# Altium PCB Pre-Proj-Pch.PcbDoc
Units mil, origin at the board's own origin, x right, y up, seen from the top; angles counter-clockwise.
Board outline 6000 x 4000 mil, 2 copper layers (Top Layer, Bottom Layer); 15 components, 29 nets, 105 pads, 0 vias.
Unrouted connection lines stored in the file: 2.
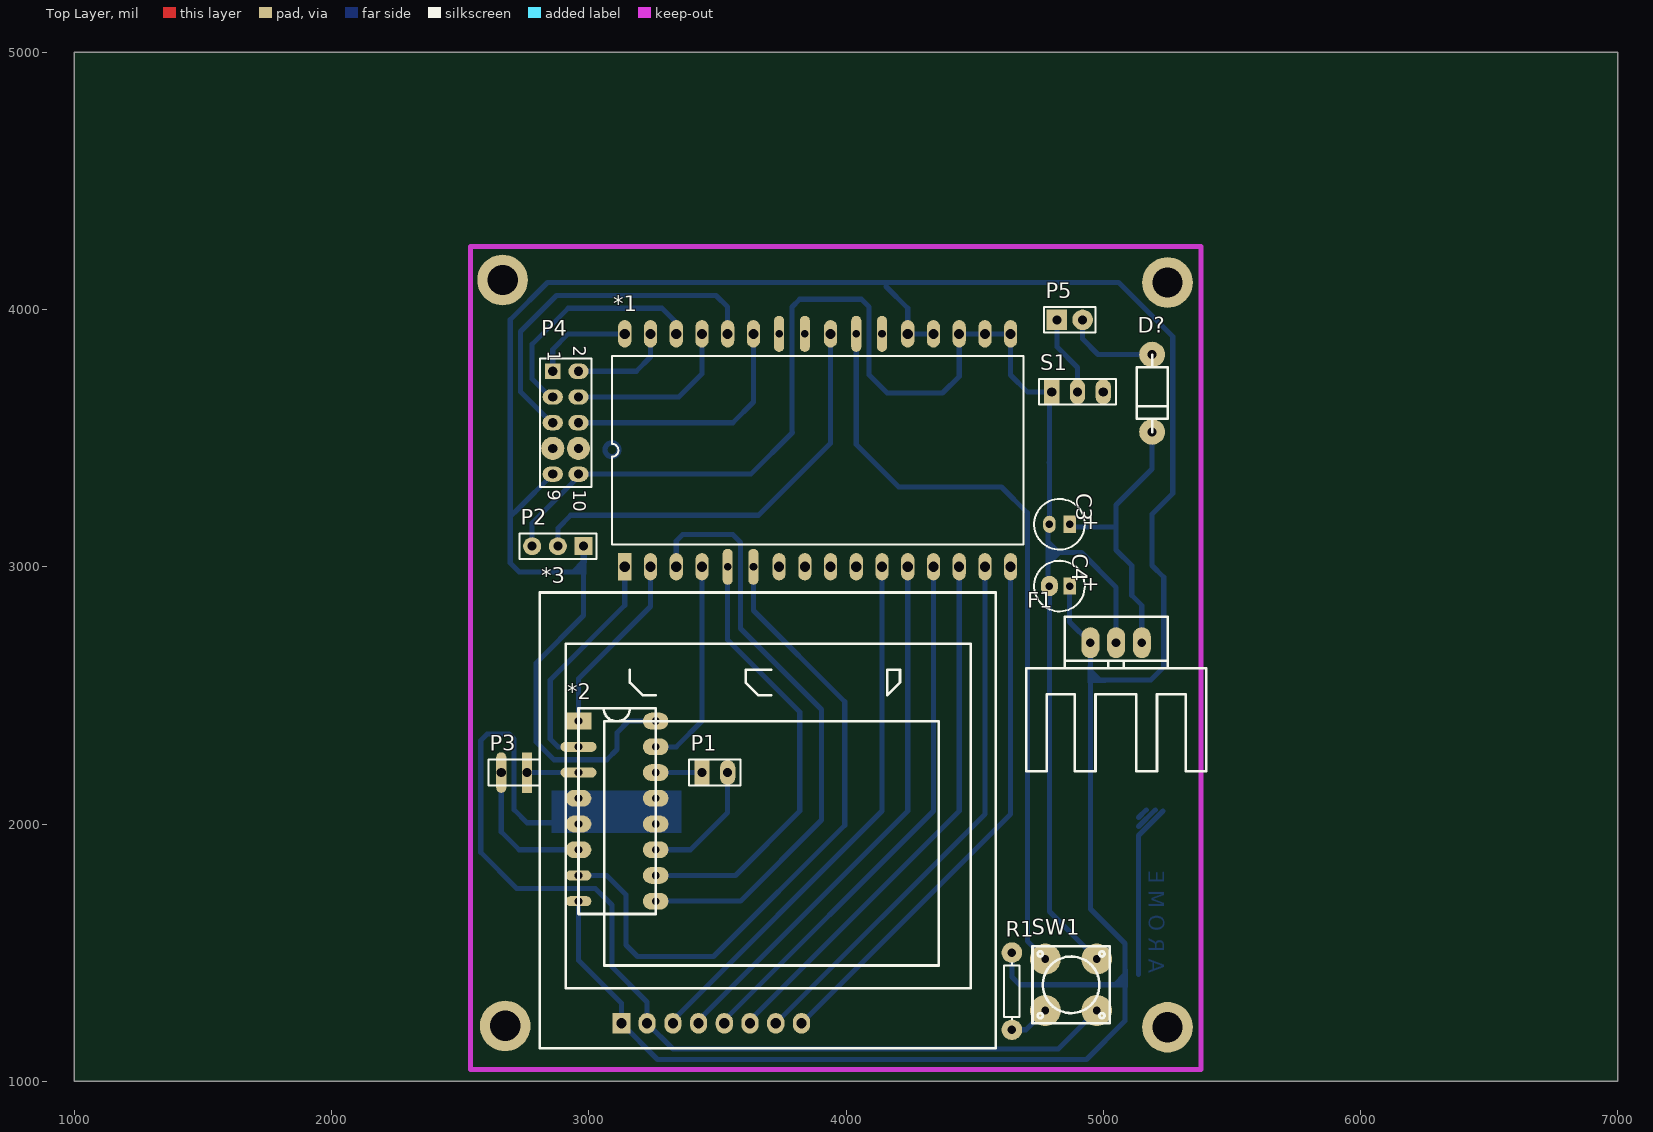
[diagram p0: Top Layer view]
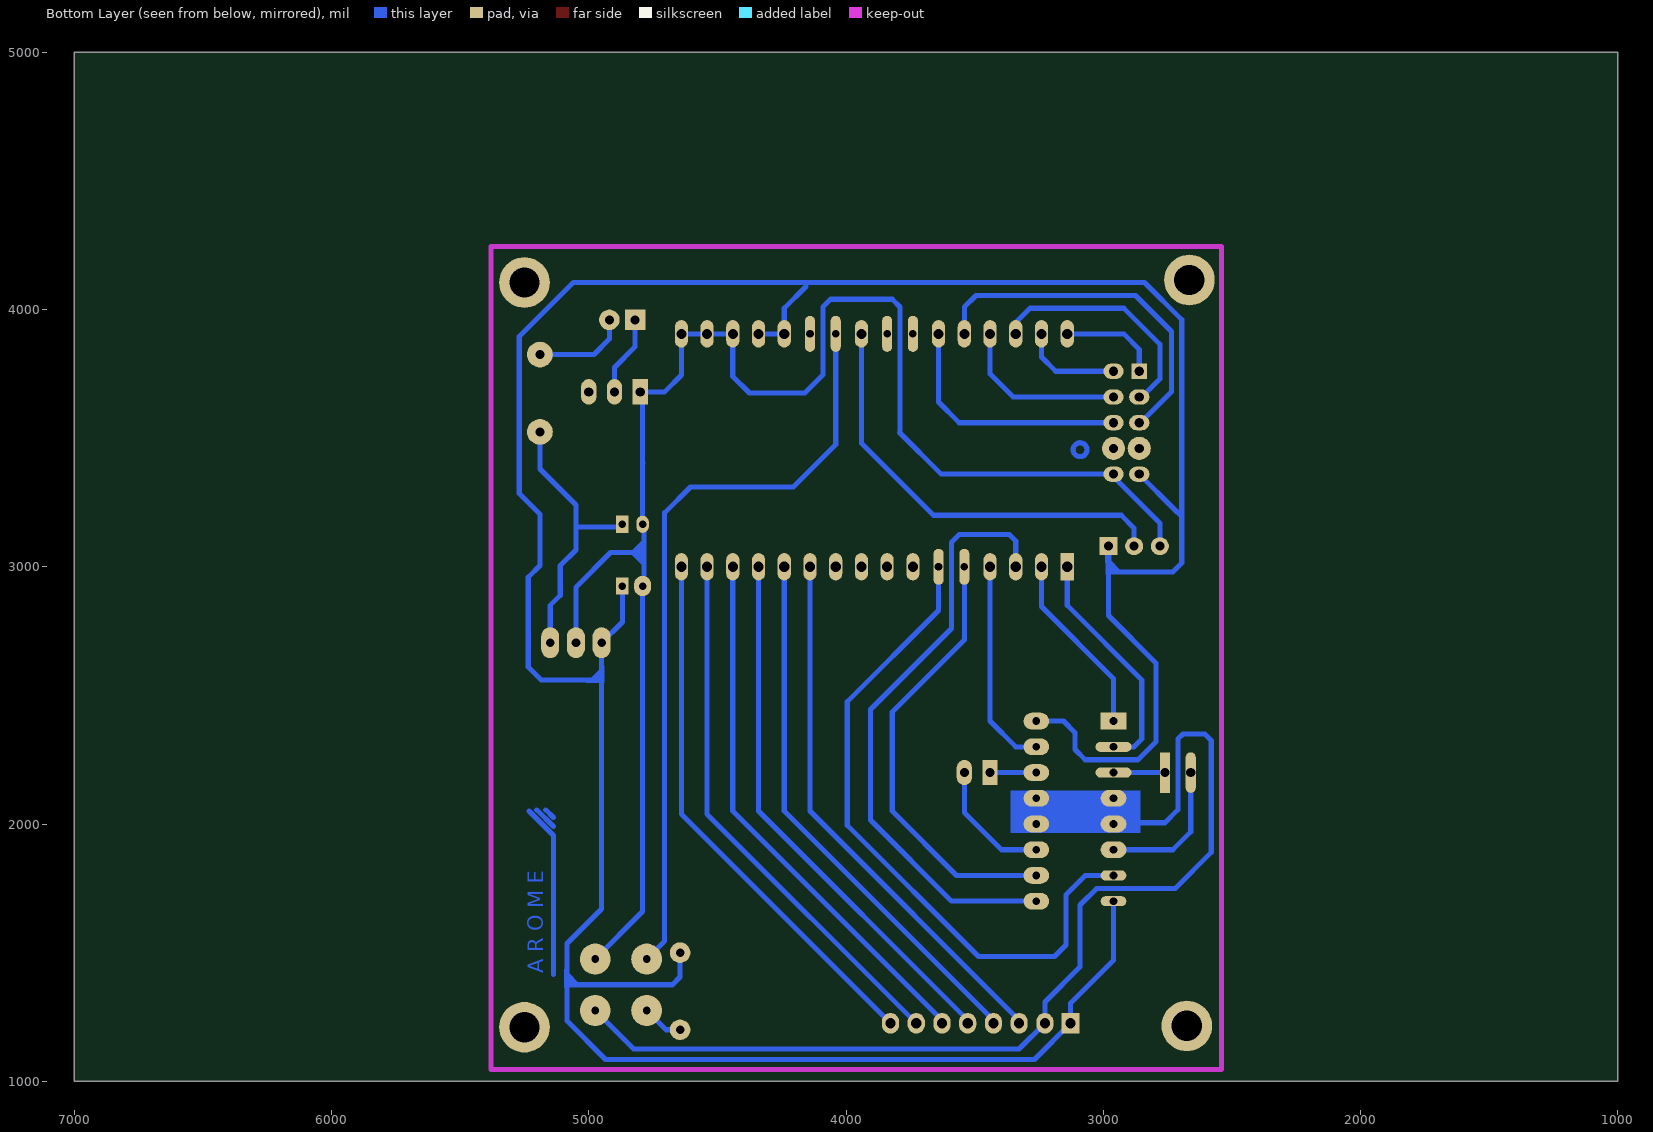
[diagram p1: Bottom Layer view, seen from below]

## Layer stack, top to bottom
Top Layer: signal copper 1.4
Dielectric: dielectric 12.6, FR-4, Dk 4.8
Bottom Layer: signal copper 1.4

## Board outline
1000,1000 7000,1000 7000,5000 1000,5000

## Design rules (kind name [scope] priority, off if disabled: settings)
Clearance [All] p1: gap=20
PolygonConnect [All] p1: connectstyle=Relief reliefconductorwidth=10 reliefentries=4 polygonreliefangle="90 Angle"
RoutingVias [All] p1: holewidth=28 width=50 viastyle="Through Hole" minholewidth=28 minwidth=50 maxholewidth=28 maxwidth=50
SilkscreenOverComponentPads [All] p1: minsilkscreentomaskgap=10
SolderMaskExpansion [All] p1: expansion=4
Width [All] p1: maxlimit=25 minlimit=20 preferedwidth=20
27 further rules are at their usual default settings.

## Components (designator, comment, footprint, x,y, rotation, side; value= is the part's Value field where it differs from the comment)
*1 "Atmega8_Stamp" Atmega8_Stamp 3140,3000 r90 top
*2 "L293D" dip-16 3060,2300 r0 top
*3 "GLCDBoxHeader10Pin" GLCDBoxHeader10Pin 3560,2800 r0 top
C3 "Cap Pol1" CAPPR2-5x6.8#1 4830,3165 r180 top
C4 "Cap Pol1" CAPPR2-5x6.8#2 4830,2925 r180 top
D? "DIODE" diode 5290,3625 r270 top
F1 "L7805CV" 78xx 4950,2905 r180 top
P1 "Header 2" HDR1X2#1 3440,2200 r0 top
P2 "Header 3" HDR1X3#1 2980,3080 r180 top
P3 "Header 2" HDR1X2#2 2760,2200 r180 top
P4 "Header 5X2" HDR2X5 2860,3760 r270 top
P5 "Header 2" HDR1X2#3 4820,3960 r0 top
R1 "Res1" AXIAL-0.3 4645,1350 r90 top
S1 "SW-SPDT" HDR1X3#2 4800,3680 r0 top
SW1 "U-SW4" u-sw4 4875,1375 r0 top

## Footprints (in the part's own frame and the unit in brackets; to place one, negate y for a bottom-side part, rotate by r counter-clockwise, add the part's x,y. Pads: shape width x height; smd on the part's side, far side on the other; paste and mask are expansions set on the pad)
78xx [mil]
  oval 70x120 hole 34: 1(-200,200) 2(-100,200) 3(0,200)
  silkscreen extent -450,100 250,700
Atmega8_Stamp [mm]
  rect 2.7x1.3 hole 1: 1(0,0)
  oval 2.7x1.3 hole 1: 2(0,-2.54) 3(0,-5.08) 4(0,-7.62) 7(0,-15.24) 8(0,-17.78) 9(0,-20.32) 10(0,-22.86) 11(0,-25.4) 12(0,-27.94) 13(0,-30.48) 14(0,-33.02) 15(0,-35.56) 16(0,-38.1) 17(23,-38.1) 18(23,-35.56) 19(23,-33.02) 20(23,-30.48) 21(23,-27.94) 24(23,-20.32) 27(23,-12.7) 28(23,-10.16) 29(23,-7.62) 30(23,-5.08) 31(23,-2.54) 32(23,0)
  oval 3.556x1 hole 0.762: 5(0,-10.16) 6(0,-12.7) 22(23,-25.4) 23(23,-22.86) 25(23,-17.78) 26(23,-15.24)
  silkscreen extent 2.18,-39.37 20.82,1.27
AXIAL-0.3 [mil] "Axial Device, Thru-Hole; 2 Leads; 0.3 in Pin Spacing"
  round 80 hole 33.46: 1(-150,0) 2(150,0)
  silkscreen extent -109,-30 109,30
CAPPR2-5x6.8#1 [mm] "Capacitor, Electrolytic, Radial; Body 5 x 6.8 mm (Dia.xH typ); Pin Spacing 2 mm (typ)"
  rect 1.25x1.7 hole 0.75: 1(-1,0)
  oval 1.25x1.7 hole 0.75: 2(1,0)
  silkscreen extent -2.5,-2.5 2.5,2.5
CAPPR2-5x6.8#2 [mm] "Capacitor, Electrolytic, Radial; Body 5 x 6.8 mm (Dia.xH typ); Pin Spacing 2 mm (typ)"
  rect 1.25x1.7 hole 0.75: 1(-1,0)
  oval 1.7x2 hole 0.75: 2(1,0)
  silkscreen extent -2.5,-2.5 2.5,2.5
diode [mil]
  round 100 hole 35: 1(-200,-100) 2(101,-100)
  silkscreen extent -199,-160 101,-40
dip-16 [mil]
  rect 100x65 hole 30: 1(-100,100)
  oval 140x39.37 hole 30: 2(-100,0) 3(-100,-100)
  oval 100x65 hole 30: 4(-100,-200) 5(-100,-300) 6(-100,-400) 9(200,-600) 10(200,-500) 11(200,-400) 12(200,-300) 13(200,-200) 14(200,-100) 15(200,0) 16(200,100)
  oval 100x39.37 hole 30: 7(-100,-500) 8(-100,-600)
  silkscreen extent -100,-650 200,150
GLCDBoxHeader10Pin [mm]
  rect 1.778x2.032 hole 1: 1(-11,-40)
  round 1.7 on Top Overlay: 1(0,0) 2(2.54,0) 3(5.08,0) 4(7.62,0) 5(10.16,0) 6(12.7,0) 7(15.24,0) 8(17.78,0)
  oval 1.7x2.032 hole 1: 2(-8.46,-40) 3(-5.92,-40) 4(-3.38,-40) 5(-0.84,-40) 6(1.7,-40) 7(4.24,-40) 8(6.78,-40)
  silkscreen extent -19.05,-42.46 25.95,2.54, body extent -16.51,-41.27 24.13,1.27, height 16
HDR1X2#1 [mm] "Connector; Header; 2 Position"
  rect 1.5x2.5 hole 0.9: 1(0,0)
  oval 1.5x2.5 hole 0.9: 2(2.54,0)
  silkscreen extent -1.27,-1.27 3.81,1.27
HDR1X2#2 [mm] "Connector; Header; 2 Position"
  rect 1x4 hole 0.9: 1(0,0)
  oval 1x4 hole 0.9: 2(2.54,0)
  silkscreen extent -1.27,-1.27 3.81,1.27
HDR1X2#3 [mm] "Connector; Header; 2 Position"
  rect 2.032x2.032 hole 0.9: 1(0,0)
  round 2.032 hole 0.9: 2(2.54,0)
  silkscreen extent -1.27,-1.27 3.81,1.27
HDR1X3#1 [mil] "Connector; Header; 3 Position"
  rect 70x70 hole 35.43: 1(0,0)
  round 70 hole 35.43: 2(100,0) 3(200,0)
  silkscreen extent -50,-50 250,50
HDR1X3#2 [mil] "Connector; Header; 3 Position"
  rect 59.06x98.43 hole 35.43: 1(0,0)
  oval 59.06x98.43 hole 35.43: 2(100,0) 3(200,0)
  silkscreen extent -50,-50 250,50
HDR2X5 [mm] "Connector; Header; 5x2 Position"
  rect 1.5x1.5 hole 0.9: 1(0,0)
  oval 1.5x2 hole 0.9: 2(0,2.54) 3(2.54,0) 4(2.54,2.54) 5(5.08,0) 6(5.08,2.54) 9(10.16,0) 10(10.16,2.54)
  round 2.286 hole 0.9: 7(7.62,0) 8(7.62,2.54)
  silkscreen extent -1.27,-1.27 11.43,3.81
u-sw4 [mil]
  round 120 hole 30: 1(-100,-100) 1(-100,100) 2(100,-100) 2(100,100)
  silkscreen extent -150,-150 150,150

## Part data
C3 C4: "Polarized Capacitor (Radial)"
D?: "diode"
F1: library part 78XX, "78xx"
P1 P3 P5: "Header, 2-Pin"
P2: "Header, 3-Pin"
P4: "Header, 5-Pin, Dual row"
R1: "Resistor"
S1: "SPDT Subminiature Toggle Switch, Right Angle Mounting, Vertical Actuation"
SW1: "u-sw4"

## Free pads (board coordinates)
  round 196.85 hole 118.11: S(2665,4115) S(2675,1215) S(5250,1210) S(5250,4105)

## Nets (pads, with @x,y where several pads share a name; then routed paths per layer and width w, separated by ;. In a path a pad name is that pad's centre, name@x,y a point inside that pad or via, vN(x,y) a via of type N, cw(c..) or ccw(c..) an arc to the next point about the centre after c; other vN are vias at no path point)
+5: *1.20 *1.21 *2.8 *2.16 *3.1@3126.93,1225.2 C4.1 F1.3 P2.1 P4.9 R1.2 | length 12632.2
  Bottom Layer w20: 2722.5,3222.5 2695,3195 ; 2724.53,3224.53 P4.9 ; *2.8 2960,1470 3126.93,1303.07 3126.93,1225.2 3267.13,1085 4935,1085 5085,1235 5085,1415 ; *2.16@3215,2400 *2.16 3155,2400 3110,2355 3110,2290 3070,2250 2865,2250 2795,2320 2795,2625 2980,2810 2980,3020 2940,2980 2730,2980 2695,3015 2695,3195 ; 4155,4090 4240,4005 *1.21 *1.20 ; R1.2 4645,1405 4675,1375 5045,1375 5085,1415 ; C4.1 4869.37,2785.63 F1.3 4950,2595 ; 2695,3195 2695,3960 2840,4105 5060,4105 5270,3895 5270,3285 5189.37,3204.37 5189.37,3005 5235,2959.37 5235,2610 5185,2560 4985,2560 4950,2595 ; 4950,2595 4950,1670 5085,1535 5085,1415
  Bottom Layer w25: 2980,3020 P2.1
GND: *1.17 *1.18 *1.19 *2.4 *2.5 *2.12 *2.13 *3.2@3226.93,1225.2 C3.2 C4.2 F1.2 P2.3 P4.10 S1.1 SW1.2 | length 10371.8
  Bottom Layer w20: P2.3 2780,3170 2960,3350 P4.10 3630,3360 3792.5,3522.5 3790,3525 3790,4010 3820,4040 4060,4040 4090,4010 4090,3745 4160,3675 4375,3675 4440,3740 *1.19 *1.18 *1.17 4640,3745 4705,3680 S1.1 4790.63,3670.63 4790.63,3405 ; *2.5 2955,2005 2760,2005 2710,2055 2710,2330 2690,2350 2605,2350 2580,2325 2580,1890 2720.32,1749.68 3025.32,1749.68 3090,1685 3090,1445 3226.93,1308.07 3226.93,1225.2 3327.13,1125 4825,1125 SW1.2@4975,1275 ; 4790,3405.63 4790.63,3405 ; SW1.2@4975,1475 4790.63,1659.37 C4.2 4785.63,2930 4785.63,3055 ; F1.2 5050,2920 4915,3055 4785.63,3055 ; 4785.63,3055 4785.63,3160 C3.2 4790.63,3405
Net*1_1: *1.1 *2.2 | length 912.5
  Bottom Layer w20: *2.2 2880,2300 2850,2330 2850,2560 3140,2850 *1.1
Net*1_2: *1.2 *2.1 | length 716
  Bottom Layer w20: *2.1 2960,2565 3240,2845 *1.2
Net*1_3: *1.3 *2.9 | length 2358.7
  Bottom Layer w20: *2.9 3590,1700 3905,2015 3905,2445 3590,2760 3590,3095 3560,3125 3365,3125 3340,3100 *1.3
Net*1_4: *1.4 *2.15 | length 821.4
  Bottom Layer w20: *2.15 3340,2300 3440,2400 *1.4
Net*1_5: *1.5 *2.10 | length 1729.5
  Bottom Layer w20: *2.10 3570,1800 3820,2050 3820,2435 3540,2715 *1.5
Net*1_6: *1.6 *2.7 | length 2694.2
  Bottom Layer w20: *2.7@3005,1800 *2.7 3070,1800 3145,1725 3145,1530 3190,1485 3485,1485 3995,1995 3995,2475 3640,2830 *1.6 *1.6@3640,2993.82
Net*1_11: *1.11 *3.3@3326.93,1225.2 | length 2111.6
  Bottom Layer w20: *3.3@3326.93,1225.2 3326.93,1236.93 4140,2050 *1.11
Net*1_12: *1.12 *3.4@3426.93,1225.2 | length 2111.6
  Bottom Layer w20: *3.4@3426.93,1225.2 3426.93,1236.93 4240,2050 *1.12
Net*1_13: *1.13 *3.5@3526.93,1225.2 | length 2111.6
  Bottom Layer w20: *3.5@3526.93,1225.2 3526.93,1236.93 4340,2050 *1.13
Net*1_14: *1.14 *3.6@3626.93,1225.2 | length 2111.6
  Bottom Layer w20: *3.6@3626.93,1225.2 3626.93,1236.93 4440,2050 *1.14
Net*1_15: *1.15 *3.7@3726.93,1225.2 | length 2111.6
  Bottom Layer w20: *3.7@3726.93,1225.2 4540,2038.27 *1.15
Net*1_16: *1.16 *3.8@3826.93,1225.2 | length 2111.6
  Bottom Layer w20: *3.8@3826.93,1225.2 4640,2038.27 *1.16
Net*1_23: *1.23 R1.1 SW1.1 | length 3130.3
  Bottom Layer w20: *1.23 4040,3475 4205,3310 4605,3310 4705,3210 4705,1545 SW1.1@4775,1475 ; R1.1 4700,1200 SW1.1@4775,1275
Net*1_24: *1.24 P2.2 | length 1692.2
  Bottom Layer w20: P2.2 2880,3150 2930,3200 3660,3200 3940,3480 *1.24
Net*1_27: *1.27 P4.6 | length 978.6
  Bottom Layer w20: P4.6 3560,3560 3640,3640 *1.27
Net*1_28: *1.28 P4.5 | length 1411.6
  Bottom Layer w20: P4.5@2860,3575.82 P4.5 2855,3560 2735,3680 2735,3915 2875,4055 3495,4055 3540,4010 *1.28
Net*1_29: *1.29 P4.4 | length 672.8
  Bottom Layer w20: P4.4 3350,3660 3440,3750 *1.29
Net*1_30: *1.30 P4.3 | length 929.3
  Bottom Layer w20: P4.3 2850,3660 2780,3730 2780,3865 2920,4005 3285,4005 3340,3950 *1.30
Net*1_31: *1.31 P4.2 | length 393.3
  Bottom Layer w20: P4.2 3185,3760 3240,3815 *1.31
Net*1_32: *1.32 P4.1 | length 390.1
  Bottom Layer w20: P4.1 2860,3845 2920.51,3905.51 *1.32
Net*2_3: *2.3 P3.1 | length 200
  Bottom Layer w20: P3.1 *2.3
Net*2_6: *2.6 P3.2 | length 559
  Bottom Layer w20: P3.2 2660,1970 2730,1900 *2.6
Net*2_11: *2.11 P1.2 | length 495.1
  Bottom Layer w20: *2.11 3395,1900 3540,2045 P1.2
Net*2_14: *2.14 P1.1 | length 180
  Bottom Layer w20: *2.14 P1.1
NetC3_1: C3.1 D?.2 F1.1 | length 1103.2
  Bottom Layer w20: C3.1 4879.37,3155 5050,3155 ; F1.1 5150,2850 5110.63,2889.37 5110.63,3005 5050,3065.63 5050,3155 ; D?.2 5190,3380 5050,3240 5050,3155
NetD?_1: D?.1 P5.2 | length 369.9
  Bottom Layer w20: P5.2 4920,3885 4980,3825 D?.1
NetP5_1: P5.1 S1.2 | length 313.1
  Bottom Layer w20: P5.1 4820,3855 4900,3775 S1.2
pads on no net: *1.7 *1.8 *1.9 *1.10 *1.22 *1.25 *1.26 *3.1@3560,2800 *3.2@3660,2800 *3.3@3760,2800 *3.4@3860,2800 *3.5@3960,2800 *3.6@4060,2800 *3.7@4160,2800 *3.8@4260,2800 P4.7 P4.8 S1.3
copper on no net: | length 977.9
  Bottom Layer w20: 5137.52,1415 5137.52,1955 5232.52,2050 ; 5137.52,1990 5202.52,2055 ; 5137.52,2025 5167.52,2055 ; 3116.93,3455 ccw(c3090,3455) 3116.93,3455

## Keep-outs
Keep-Out Layer:
  lines w20: 2540,1045 5380,1045 5380,4245 2540,4245 2540,1045

## Other copper
Bottom Layer:
  rectangle net GND: 2855,1965 3360,2130
  region net +5: 5030,1365 5095,1435 5095,1365
  region net +5: 4940,2615 5010,2550 4940,2550
  region net GND: 4785.63,3105 4790,3105 4840,3055 4785.63,3000.63
  region net +5: 2935,2970 2990,2970 2990,3025
  text "A R O M E" at 5177.52,1420 h60 r270

## Text inside footprints (layer, text, board x,y; h text height)
C3: Top Overlay "+" at 4986.5,3194.53 h59.06 r180
C4: Top Overlay "+" at 4986.5,2954.53 h59.06 r180
P4: Top Overlay "10" at 2940,3300 h50 r270; Top Overlay "9" at 2840,3300 h50 r270; Top Overlay "1" at 2840,3840 h50 r270; Top Overlay "2" at 2940,3860 h50 r270